# EAGLE board Practica2 (EAGLE 9.6.2)
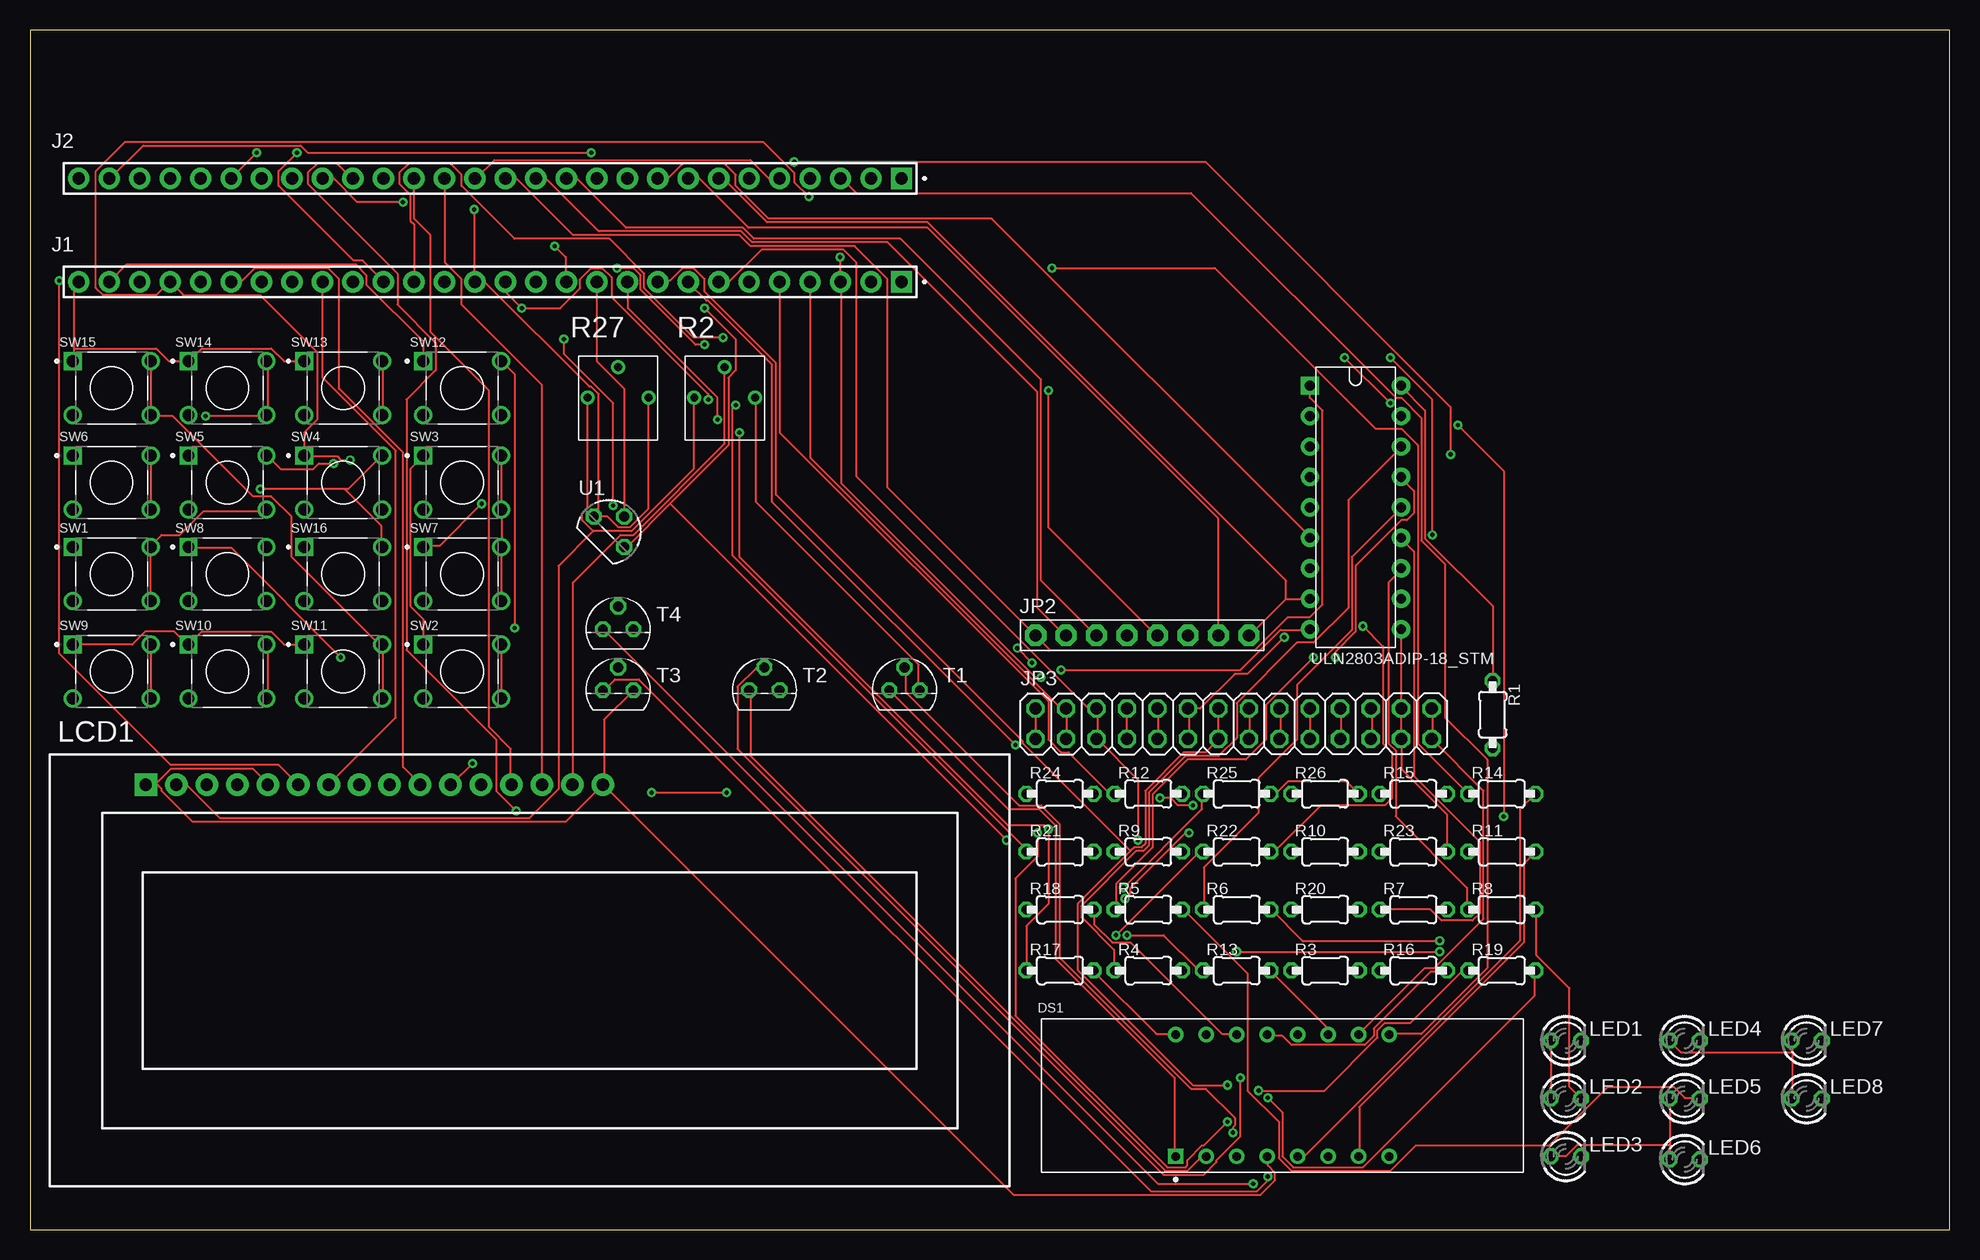
[diagram p0: board, top side]
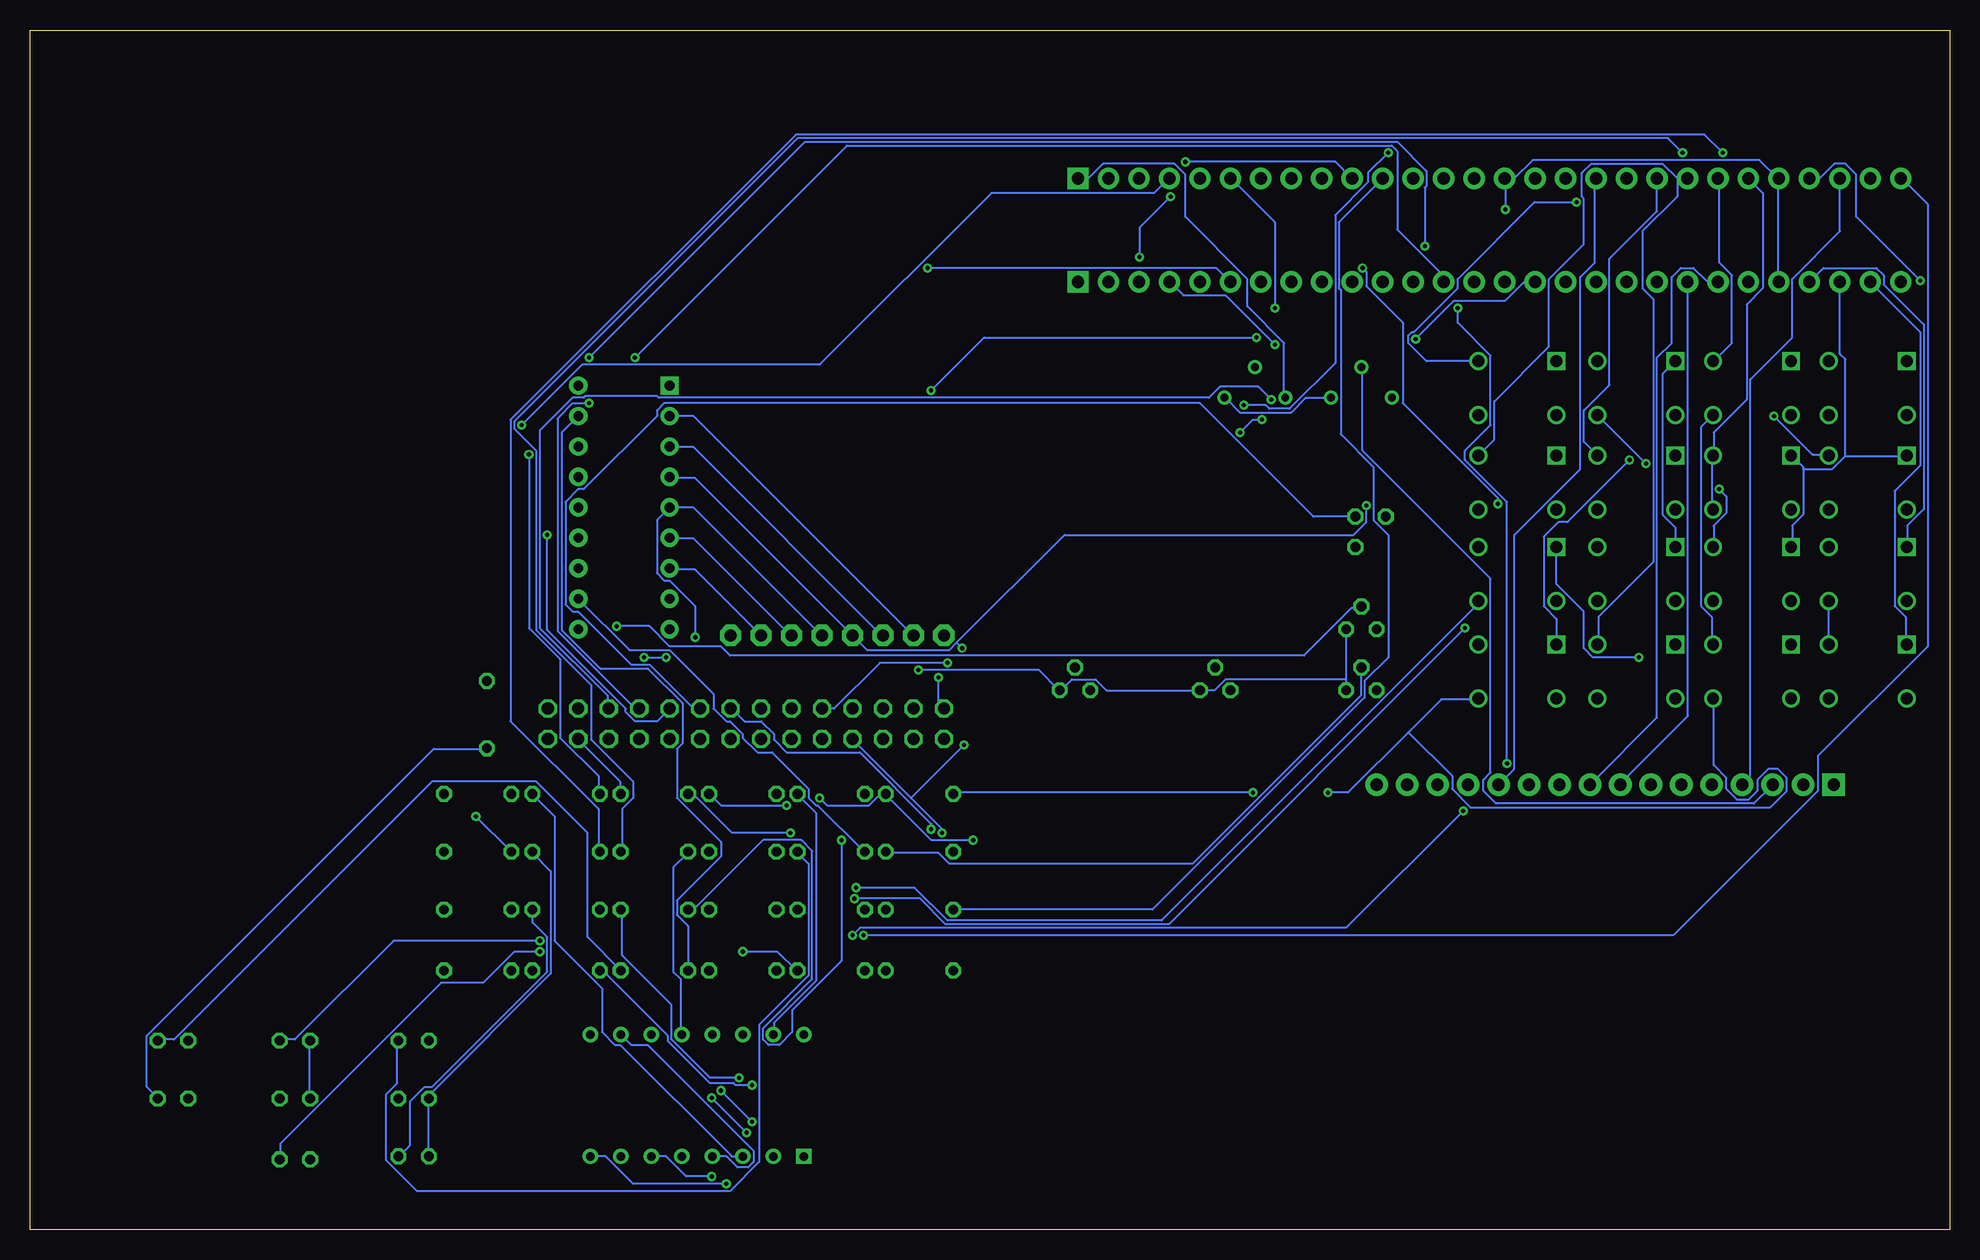
[diagram p1: board, bottom side, seen from below]

Size 160 x 100 mm. Coordinates in mm from the lower left corner, seen from the top.
Outline: 0,0 160,0 160,100 0,100 0,0
Copper layers (1*16): Top 0.035mm / dielectric 1.5mm / Bottom 0.035mm
Design rules "default *": minimum track width 6mil, minimum drill 0.35mm, track to track 6mil, track to pad 6mil, pad to pad 6mil, via to via 6mil, smd to smd 6mil, copper to edge 15mil, drill to drill 6mil, minimum pad ring 10mil, minimum via ring 8mil, stop-mask expansion 4mil, vias tented up to drill 0mil, thermal gap 10mil

## Footprints (pad centres in the part's own frame; a part is rotated, then mirrored left to right if it is on the bottom)
DISPLAY_TDCG1060M = drill 0.7 pad 1.27 square: 1 -8.89,-5.08 | drill 0.7 pad 1.27: 2 -6.35,-5.08; 3 -3.81,-5.08; 4 -1.27,-5.08; 5 1.27,-5.08; 6 3.81,-5.08; 7 6.35,-5.08; 8 8.89,-5.08; 9 8.89,5.08; 10 6.35,5.08; 11 3.81,5.08; 12 1.27,5.08; 13 -1.27,5.08; 14 -3.81,5.08; 15 -6.35,5.08; 16 -8.89,5.08
DIP-18_STM = drill 0.813 pad 1.524 square: 1 0,0 | drill 0.813 pad 1.524: 2 0,-2.54; 3 0,-5.08; 4 0,-7.62; 5 0,-10.16; 6 0,-12.7; 7 0,-15.24; 8 0,-17.78; 9 0,-20.32; 10 7.62,-20.32; 11 7.62,-17.78; 12 7.62,-15.24; 13 7.62,-12.7; 14 7.62,-10.16; 15 7.62,-7.62; 16 7.62,-5.08; 17 7.62,-2.54; 18 7.62,0
SAMTEC_SS-128-T-2 = drill 1.016 pad 1.778 square: 01 0,0 | drill 1.016 pad 1.778: 02 -2.54,0; 03 -5.08,0; 04 -7.62,0; 05 -10.16,0; 06 -12.7,0; 07 -15.24,0; 08 -17.78,0; 09 -20.32,0; 10 -22.86,0; 11 -25.4,0; 12 -27.94,0; 13 -30.48,0; 14 -33.02,0; 15 -35.56,0; 16 -38.1,0; 17 -40.64,0; 18 -43.18,0; 19 -45.72,0; 20 -48.26,0; 21 -50.8,0; 22 -53.34,0; 23 -55.88,0; 24 -58.42,0; 25 -60.96,0; 26 -63.5,0; 27 -66.04,0; 28 -68.58,0
1X08-BIG = drill 1.016 pad 1.778 octagon: 1 -8.89,0; 2 -6.35,0; 3 -3.81,0; 4 -1.27,0; 5 1.27,0; 6 3.81,0; 7 6.35,0; 8 8.89,0
2X14 = drill 1.016 octagon: 1 -16.51,-1.27; 2 -16.51,1.27; 3 -13.97,-1.27; 4 -13.97,1.27; 5 -11.43,-1.27; 6 -11.43,1.27; 7 -8.89,-1.27; 8 -8.89,1.27; 9 -6.35,-1.27; 10 -6.35,1.27; 11 -3.81,-1.27; 12 -3.81,1.27; 13 -1.27,-1.27; 14 -1.27,1.27; 15 1.27,-1.27; 16 1.27,1.27; 17 3.81,-1.27; 18 3.81,1.27; 19 6.35,-1.27; 20 6.35,1.27; 21 8.89,-1.27; 22 8.89,1.27; 23 11.43,-1.27; 24 11.43,1.27; 25 13.97,-1.27; 26 13.97,1.27; 27 16.51,-1.27; 28 16.51,1.27
LCD-16X2_NOHOLESNOSILK = drill 1.016 pad 1.88 square: 1 -32,15.5 | drill 1.016 pad 1.88: 2 -29.46,15.5; 3 -26.92,15.5; 4 -24.38,15.5; 5 -21.84,15.5; 6 -19.3,15.5; 7 -16.76,15.5; 8 -14.22,15.5; 9 -11.68,15.5; 10 -9.14,15.5; 11 -6.6,15.5; 12 -4.06,15.5; 13 -1.52,15.5; 14 1.02,15.5; 15 3.56,15.5; 16 6.1,15.5
LED3MM = drill 0.813 octagon: A -1.27,0; K 1.27,0
0207/10 = drill 0.813 octagon: 1 -1.54,0; 2 4.08,0
3362P-1-103LF = drill 0.66: 1 -2.54,0; 2 0,2.54; 3 2.54,0
TE_1825910-2 = drill 0.99 square: 1 0,0 | drill 0.99: 2 6.5,0; 3 0,-4.5; 4 6.5,-4.5
TO92 = drill 0.813 octagon: 1 1.27,0; 2 0,1.905; 3 -1.27,0
TO92/ = drill 0.813 octagon: 1 1.27,-1.27; 2 1.27,1.27; 3 -1.27,1.27

## Placement (x,y rotation side)
DS1  TDCG1060M  [DISPLAY_TDCG1060M]  104.39,11.18 0 top
IC1  ULN2803ADIP-18_STM  [DIP-18_STM]  106.68,70.36 0 top
J1  SS-128-T-2  [SAMTEC_SS-128-T-2]  72.64,78.99 0 top
J2  SS-128-T-2  [SAMTEC_SS-128-T-2]  72.64,87.63 0 top
JP2  [1X08-BIG]  92.71,49.53 0 top
JP3  [2X14]  100.33,42.16 0 top
LCD1  LCD-16X2NOHOLES  [LCD-16X2_NOHOLESNOSILK]  41.66,21.59 0 top
LED1  [LED3MM]  128.02,15.75 0 top
LED2  [LED3MM]  128.02,10.92 0 top
LED3  [LED3MM]  128.02,6.1 0 top
LED4  [LED3MM]  137.92,15.75 0 top
LED5  [LED3MM]  137.92,10.92 0 top
LED6  [LED3MM]  137.92,5.84 0 top
LED7  [LED3MM]  148.08,15.75 0 top
LED8  [LED3MM]  148.08,10.92 0 top
R1  R-US  [0207/10]  121.92,44.2 270 top
R2  10K  [3362P-1-103LF]  57.91,69.34 0 top
R3  R-US  [0207/10]  106.68,21.59 0 top
R4  R-US  [0207/10]  91.95,21.59 0 top
R5  R-US  [0207/10]  91.95,26.67 0 top
R6  R-US  [0207/10]  99.31,26.67 0 top
R7  R-US  [0207/10]  114.05,26.67 0 top
R8  R-US  [0207/10]  121.41,26.67 0 top
R9  R-US  [0207/10]  91.95,31.5 0 top
R10  R-US  [0207/10]  106.68,31.5 0 top
R11  R-US  [0207/10]  121.41,31.5 0 top
R12  R-US  [0207/10]  91.95,36.32 0 top
R13  R-US  [0207/10]  99.31,21.59 0 top
R14  R-US  [0207/10]  121.41,36.32 0 top
R15  R-US  [0207/10]  114.05,36.32 0 top
R16  R-US  [0207/10]  114.05,21.59 0 top
R17  R-US  [0207/10]  84.58,21.59 0 top
R18  R-US  [0207/10]  84.58,26.67 0 top
R19  R-US  [0207/10]  121.41,21.59 0 top
R20  R-US  [0207/10]  106.68,26.67 0 top
R21  R-US  [0207/10]  84.58,31.5 0 top
R22  R-US  [0207/10]  99.31,31.5 0 top
R23  R-US  [0207/10]  114.05,31.5 0 top
R24  R-US  [0207/10]  84.58,36.32 0 top
R25  R-US  [0207/10]  99.31,36.32 0 top
R26  R-US  [0207/10]  106.68,36.32 0 top
R27  10K  [3362P-1-103LF]  49.02,69.34 0 top
SW1  1825910-2  [TE_1825910-2]  3.56,56.9 0 top
SW2  1825910-2  [TE_1825910-2]  32.77,48.77 0 top
SW3  1825910-2  [TE_1825910-2]  32.77,64.52 0 top
SW4  1825910-2  [TE_1825910-2]  22.86,64.52 0 top
SW5  1825910-2  [TE_1825910-2]  13.21,64.52 0 top
SW6  1825910-2  [TE_1825910-2]  3.56,64.52 0 top
SW7  1825910-2  [TE_1825910-2]  32.77,56.9 0 top
SW8  1825910-2  [TE_1825910-2]  13.21,56.9 0 top
SW9  1825910-2  [TE_1825910-2]  3.56,48.77 0 top
SW10  1825910-2  [TE_1825910-2]  13.21,48.77 0 top
SW11  1825910-2  [TE_1825910-2]  22.86,48.77 0 top
SW12  1825910-2  [TE_1825910-2]  32.77,72.39 0 top
SW13  1825910-2  [TE_1825910-2]  22.86,72.39 0 top
SW14  1825910-2  [TE_1825910-2]  13.21,72.39 0 top
SW15  1825910-2  [TE_1825910-2]  3.56,72.39 0 top
SW16  1825910-2  [TE_1825910-2]  22.86,56.9 0 top
T1  BC547  [TO92]  72.9,44.96 0 top
T2  BC547  [TO92]  61.21,44.96 0 top
T3  BC547  [TO92]  49.02,44.96 0 top
T4  BC547  [TO92]  49.02,50.04 0 top
U1  LM60CIZ  [TO92/]  48.26,58.17 0 top

## Library data of the parts
DS1 = TE2015_Microcontroladores; DESCRIPTION: Display Modules - LED Character and Numeric Green 7-Segment Clock 4 Character Common Cathode 2V 20mA 0.504 H x 1.583 W x 0.276 D (12.80mm x 40.20mm x 7.00mm) 16-DIP (0.400, 10.16mm); DIGI-KEY_PART_NUMBER: TDCG1060M-ND; MF: Vishay; MP: TDCG1060M; PACKAGE: None; PURCHASE-URL: https://pricing.snapeda.com/search/part/TDCG1060M/?ref=eda
IC1 = TE2015_Microcontroladores; COPYRIGHT: Copyright (C) 2022 Ultra Librarian. All rights reserved.; DIGI-KEY_PART_NUMBER_1: 497-2356-5-ND; MANUFACTURER_PART_NUMBER: ULN2803A; MFR_NAME: STMicroelectronics
J1 J2 = TE2015_Microcontroladores; DESCRIPTION: 28 Position Receptacle Connector 0.100 (2.54mm) Through Hole Gold; DIGI-KEY_PART_NUMBER: SAM1117-28-ND; MF: Samtec; MP: SS-128-T-2; PACKAGE: None; PURCHASE-URL: https://pricing.snapeda.com/search/part/SS-128-T-2/?ref=eda
JP2 LED1-LED8 U1 = TE2015_Microcontroladores
JP3 = pinhead
LCD1 = TE2015_Microcontroladores; SF_ID: LCD-00255
R1 R3-R9 = TE2015_Microcontroladores; SPICEPREFIX: 1k
R2 R27 = TE2015_Microcontroladores; CREATED_PN: PCBLayout.com; DIGIKEY_PN: 3362P-103LF-ND; MANUFACTURER: Bourns Inc.; MPN: 3362P-1-103LF
R10-R18 = TE2015_Microcontroladores; SPICEPREFIX: 130
R19-R22 = TE2015_Microcontroladores; SPICEPREFIX: 52K
R23-R26 = TE2015_Microcontroladores; SPICEPREFIX: 1K
SW1-SW16 = TE2015_Microcontroladores; AVAILABILITY: In Stock; COMMENT: 1825910-2; CONFIGURATION_POLE-THROW: Single Pole - Single Throw; CONTACT_CURRENT_RATING: 50 mA; DESCRIPTION: 50 mA SPST Round Actuator 160 Gram Force Tactile Pushbutton Switch; EU_ROHS_COMPLIANCE: Compliant; MF: TE Connectivity; MP: 1825910-2; PACKAGE: None; PRICE: None; PURCHASE-URL: https://pricing.snapeda.com/search/part/1825910-2/?ref=eda
T1-T4 = transistor-neu-to92

## Nets
GND: DS1.4 DS1.10 IC1.9 J1.15 J1.24 J2.05 J2.15 J2.24 JP3.27 JP3.28 LCD1.1 LCD1.5 LCD1.16 R2.3 R27.3 T1.1 T2.1 T3.1 T4.1 U1.3
IC: J1.02
LCD_BK: LCD1.15 R2.2
N$1: IC1.18 R1.1
N$2: IC1.17 R3.1
N$3: IC1.16 R4.1
N$4: IC1.15 R5.1
N$5: IC1.14 R6.1
N$6: IC1.13 R7.1
N$7: IC1.12 R8.1
N$8: IC1.11 R9.1
N$9: DS1.12 R10.1
N$10: LED1.K R9.2
N$11: LED2.K R8.2
N$12: LED3.K R7.2
N$13: LED4.K R6.2
N$14: LED5.K R5.2
N$15: LED6.K R4.2
N$16: LED7.K R3.2
N$17: LED8.K R1.2
N$18: DS1.7 R11.2
N$19: DS1.15 R12.2
N$20: DS1.11 R13.2
N$21: DS1.5 R14.2
N$22: DS1.3 R15.2
N$23: DS1.13 R16.2
N$24: DS1.16 R17.2
N$25: DS1.14 R18.2
N$26: DS1.8 T4.3
N$27: DS1.6 T3.3
N$28: DS1.2 T2.3
N$29: DS1.1 T1.3
N$30: R19.2 T1.2
N$31: R20.2 T2.2
N$32: R21.2 T3.2
N$33: R22.2 T4.2
NC: J1.01
RA0: IC1.1 J2.14 JP2.1
RA1: IC1.2 J2.13 JP2.2
RA2: IC1.3 J2.12 JP2.3
RA3: IC1.4 J1.16 JP2.4 JP3.9 JP3.10
RA4: IC1.5 J1.17 JP2.5 JP3.11 JP3.12
RA5: IC1.6 J2.09 JP2.6
RA6: IC1.7 J2.08 JP2.7
RA7: IC1.8 J2.07 JP2.8
RB0: J2.11 R18.1
RB1: J1.10 JP3.15 JP3.16 R17.1
RB2: J1.09 JP3.13 JP3.14 R16.1
RB3: J2.10 R15.1
RB4: J1.06 R14.1
RB5: J2.19 R13.1
RB6: J1.05 R12.1
RB7: J2.04 R11.1
RC0: J2.28 R22.1
RC1: J2.27 R21.1
RC2: J1.07 JP3.5 JP3.6 R20.1
RC3: J1.08 JP3.7 JP3.8 R19.1
RC4: J1.11 JP3.17 JP3.18 U1.2
RC5: J1.12 JP3.19 JP3.20
RC6: J1.13 JP3.21 JP3.22
RC7: J1.19
RD0: J1.20 LCD1.7
RD1: J1.21 LCD1.8
RD2: J1.22 LCD1.9
RD3: J1.23 LCD1.10
RD4: J1.14 JP3.23 JP3.24 LCD1.11
RD5: J2.18 LCD1.12
RD6: J2.17 LCD1.13
RD7: J2.16 LCD1.14
RE0: J2.26 LCD1.4
RE1: J2.25 LCD1.6
RE2: J1.18 R10.2
RE3: DS1.9 J2.03
RF0: J1.03 J1.25 JP3.1 JP3.2 SW1.1 SW2.1 SW3.1 SW4.1
RF1: J1.04 J1.26 JP3.3 JP3.4 SW5.1 SW6.1 SW7.1 SW8.1
RF2: J1.27 SW9.1 SW10.1 SW11.1 SW12.1
RF3: J1.28 SW13.1 SW14.1 SW15.1 SW16.1
RF4: J2.23 R23.1 SW1.2 SW1.4 SW5.2 SW5.4 SW9.2 SW9.4 SW13.2 SW13.4
RF5: J2.22 R24.1 SW2.2 SW2.4 SW6.2 SW6.4 SW10.2 SW10.4 SW14.2 SW14.4
RF6: J2.21 R25.1 SW3.2 SW3.4 SW7.2 SW7.4 SW11.2 SW11.4 SW15.2 SW15.4
RF7: J2.20 R26.1 SW4.2 SW8.2 SW12.2 SW16.2
VBUS: J2.01 LCD1.2 R2.1 R27.1
VO: LCD1.3 R27.2
VOFF: J2.02
VTG: IC1.10 J2.06 JP3.25 JP3.26 LED1.A LED2.A LED3.A LED4.A LED5.A LED6.A LED7.A LED8.A R23.2 R24.2 R25.2 R26.2 U1.1

## Tracks (layer width: path | path; a pad name or v marks a point on that pad's centre or on a via)
GND  (via drill 0.35)
  Top 0.152: 47.4,59.44 48.16,59.44 49.07,58.52 49.99,58.52 51.51,60.05 51.51,69.34 R27.3 | 47.4,59.44 U1.3 47.09,59.44 | 47.4,59.44 47.4,69.65 46.79,70.26 46.63,70.26 37.95,78.94 37.19,78.94 J1.15 37.03,79.1 v37.03,85.04 | J2.05 61.57,87.63 60.05,89.15 38.71,89.15 37.19,87.63 J2.15 | JP3.28 116.89,43.43 116.89,41 JP3.27 121.16,36.58 121.16,25.91 117.04,21.79 116.28,21.79 DS1.10 | v85.95,46.63 100.89,46.63 104.24,49.99 106.68,49.99 IC1.9 | 10.52,37.19 9.75,37.19 LCD1.1 10.52,37.19 | 10.52,37.19 11.73,38.41 18.59,38.41 19.81,37.19 LCD1.5 | T3.1 47.85,42.52 47.85,37.19 LCD1.16 | 10.52,37.19 10.97,36.73 10.97,36.58 13.56,33.98 44.65,33.98 47.7,37.03 LCD1.16 | DS1.4 103.17,6.1 103.17,5.33 103.78,4.72 103.78,4.12 102.56,2.9 81.99,2.9 47.85,37.03 LCD1.16 | R2.3 60.5,69.34 60.5,60.66 74.07,47.09 74.07,44.96 T1.1
  Bottom 0.152: R27.3 53.65,69.34 54.86,68.12 59.13,68.12 60.35,69.34 R2.3 | 14.33,87.63 14.33,79.1 J1.24 | 37.03,87.63 36.27,87.63 34.75,89.15 15.85,89.15 14.33,87.63 | 14.33,87.63 J2.24 | 37.03,87.63 v37.03,85.04 | 37.03,87.63 J2.15 | DS1.4 101.96,6.1 101.04,5.18 100.13,5.18 99.67,5.64 99.67,6.55 108.51,15.39 109.88,15.39 DS1.10 | v85.95,46.63 75.89,46.63 74.22,44.96 T1.1 74.07,44.96 73.15,45.87 71.17,45.87 70.26,44.96 T2.1 61.27,44.96 60.35,45.87 50.29,45.87 | T4.1 50.29,45.87 | 50.29,45.87 T3.1
LCD_BK
  Top 0.152: R2.2 57.91,65.53 50.29,57.91 49.23,57.91 45.26,53.95 45.26,37.19 LCD1.15
N$1
  Top 0.152: R1.1 121.92,51.97 116.28,57.61 116.28,68.28 114.3,70.26 IC1.18
N$2
  Bottom 0.152: IC1.17 115.67,66.45 115.67,49.99 112.47,46.79 108.51,46.79 105.61,43.89 105.61,40.54 106.07,40.08 106.07,35.97 102.41,32.31 102.41,31.09 106.07,27.43 106.07,26.21 105.16,25.3 105.16,21.64 R3.1
N$3
  Top 0.152: R4.1 90.37,21.64 90.37,23.32 87.63,26.06 87.63,26.98 92.2,31.55 92.81,31.55 93.27,32 93.27,36.42 96.32,39.47 99.06,39.47 100.58,41 100.58,43.89 105.61,48.92 106.98,48.92 109.88,51.82 109.88,60.81 114.3,65.23 IC1.16
N$4  (via drill 0.35)
  Top 0.152: v106.98,47.7 103.02,43.74 103.02,40.84 101.35,39.17 96.47,39.17 93.57,36.27 93.57,31.85 90.53,28.8 90.53,26.67 R5.1 | v108.81,47.7 108.81,48.16 110.49,49.84 110.49,55.32 114.3,59.13 114.76,59.13 115.37,59.74 115.37,61.57 114.3,62.64 IC1.15
  Bottom 0.152: v108.81,47.7 v106.98,47.7
N$5
  Top 0.152: IC1.14 110.19,56.08 110.19,49.99 105.61,45.41 105.61,40.84 102.41,37.64 102.41,34.75 97.84,30.18 97.84,26.67 R6.1
N$6
  Top 0.152: R7.1 116.74,26.67 117.65,25.76 120.24,25.76 120.85,26.36 120.85,32.31 115.37,37.8 115.37,56.54 114.3,57.61 IC1.13
N$7
  Top 0.152: R8.1 119.79,26.67 119.79,28.5 113.84,34.44 113.84,39.93 113.23,40.54 113.23,53.95 114.3,55.02 IC1.12
N$8
  Bottom 0.152: IC1.11 110.03,48.31 106.68,48.31 103.02,44.65 103.02,43.43 101.96,42.37 101.65,42.37 100.58,41.3 100.58,41 99.36,39.78 98.15,39.78 95.1,36.73 95.1,35.97 94.49,35.36 94.34,35.36 90.53,31.55 R9.1
N$9
  Bottom 0.152: DS1.12 105.77,16.31 105.77,20.88 106.38,21.49 106.38,30.18 105.16,31.39 R10.1
N$10
  Bottom 0.152: LED1.K 129.39,15.7 129.39,12.19 130.3,11.28 130.3,5.79 127.71,3.2 101.65,3.2 99.21,5.64 99.21,17.07 95.1,21.18 95.1,30.48 96.01,31.39 R9.2
N$11
  Top 0.152: LED2.K 128.32,11.89 128.32,20.12 125.58,22.86 125.58,26.67 R8.2
N$12
  Bottom 0.152: R7.2 118.11,26.67 118.11,25.6 116.89,24.38 116.89,21.49 126.49,11.89 127.1,11.89 128.32,10.67 128.32,7.01 129.24,6.1 LED3.K
N$13  (via drill 0.35)
  Top 0.152: v117.5,24.08 106.07,24.08 103.48,26.67 R6.2
  Bottom 0.152: v117.5,24.08 129.69,24.08 137.92,15.85 139.14,15.85 LED4.K
N$14
  Top 0.152: LED5.K 139.14,10.97 137.92,10.97 137.01,11.89 131.52,11.89 126.64,7.01 115.52,7.01 113.39,4.88 105.16,4.88 104.09,5.94 104.09,8.99 101.5,11.58 101.5,21.34 96.16,26.67 R5.2
N$15  (via drill 0.35)
  Top 0.152: v100.58,23.16 v117.5,23.16
  Bottom 0.152: v117.5,23.16 119.63,23.16 122.22,20.57 125.73,20.57 139.14,7.16 139.14,5.94 LED6.K | v100.58,23.16 97.69,23.16 96.16,21.64 R4.2
N$16
  Bottom 0.152: LED7.K 149.35,15.85 147.98,15.85 126.49,37.34 117.81,37.34 113.54,33.07 113.54,24.38 110.8,21.64 R3.2
N$17
  Bottom 0.152: R1.2 121.92,40.08 126.34,40.08 150.27,16.15 150.27,11.89 149.35,10.97 LED8.K
N$18
  Top 0.152: DS1.7 110.8,6.1 110.8,10.21 124.51,23.93 124.51,30.48 125.42,31.39 R11.2
N$19
  Bottom 0.152: DS1.15 97.99,16.31 97.99,17.22 94.49,20.73 94.49,34.75 96.01,36.27 R12.2
N$20
  Top 0.152: DS1.11 108.2,16.76 103.48,21.49 R13.2
N$21
  Top 0.152: DS1.5 106.22,6.1 124.21,24.08 124.21,35.05 125.42,36.27 R14.2
N$22
  Bottom 0.152: DS1.3 101.5,6.1 110.8,15.39 111.25,15.39 112.32,16.46 112.32,20.12 116.28,24.08 116.28,34.44 118.11,36.27 R15.2
N$23
  Top 0.152: DS1.13 103.17,16.15 104.39,16.15 105.16,15.39 111.25,15.39 112.01,16.15 112.01,16.76 116.74,21.49 118.11,21.49 R16.2
N$24
  Top 0.152: DS1.16 95.4,16.31 93.88,16.31 88.7,21.49 R17.2
N$25
  Top 0.152: DS1.14 100.58,16.31 99.36,16.31 91.75,23.93 90.22,23.93 88.7,25.45 88.7,26.67 R18.2
N$26  (via drill 0.35)
  Top 0.152: v101.96,3.81 94.03,3.81 47.85,49.99 T4.3
  Bottom 0.152: DS1.8 112.01,6.1 109.73,3.81 v101.96,3.81
N$27  (via drill 0.35)
  Top 0.152: v103.17,4.42 103.17,4.12 102.26,3.2 93.42,3.2 50.75,45.87 48.77,45.87 47.85,44.96 T3.3
  Bottom 0.152: DS1.6 106.98,6.1 105.31,4.42 v103.17,4.42
N$28
  Top 0.152: DS1.2 97.69,6.1 96.47,4.88 94.64,4.88 60.05,39.47 60.05,44.96 T2.3
N$29
  Top 0.152: T1.3 81.53,35.05 84.12,35.05 85.5,33.68 85.5,22.55 95.4,12.65 95.4,6.1 DS1.1
N$30  (via drill 0.35)
  Top 0.152: v103.17,10.97 104.39,9.75 104.39,6.1 105.31,5.18 111.1,5.18 125.42,19.51 125.42,21.49 R19.2 | v100.28,8.08 100.28,8.53 100.43,8.69 100.43,9.3 97.99,11.73 96.77,11.73 85.8,22.71 85.8,33.83 84.28,35.36 82.45,35.36 73,44.81 73,46.79 T1.2
  Bottom 0.152: v100.28,8.08 v103.17,10.97
N$31  (via drill 0.35)
  Top 0.152: v100.89,12.65 100.89,7.77 98.91,5.79 98.91,5.64 97.84,4.57 94.49,4.57 58.98,40.08 58.98,45.26 60.5,46.79 61.11,46.79 T2.2
  Bottom 0.152: v100.89,12.65 103.33,12.65 106.53,15.85 106.53,18.75 110.64,22.86 110.64,26.67 R20.2
N$32
  Bottom 0.152: R21.2 88.54,31.39 84.28,31.39 83.36,30.48 63.09,30.48 49.07,44.5 49.07,46.79 T3.2
N$33  (via drill 0.35)
  Top 0.152: v111.1,50.29 112.78,48.62 112.78,40.54 113.54,39.78 113.54,35.97 112.93,35.36 107.59,35.36 103.78,31.55 103.48,31.55 R22.2
  Bottom 0.152: v111.1,50.29 108.36,50.29 106.68,48.62 102.41,48.62 101.65,47.85 53.8,47.85 49.84,51.82 49.07,51.82 T4.2
RA0
  Top 0.152: IC1.1 106.68,69.34 107.75,68.28 107.75,52.12 106.68,51.05 104.85,51.05 102.11,48.31 85.04,48.31 JP2.1 71.48,61.87 71.48,79.25 68.73,81.99 60.05,81.99 59.13,82.91 45.26,82.91 40.54,87.63 J2.14
RA1
  Top 0.152: J2.13 42.98,87.63 47.4,83.21 59.28,83.21 60.2,82.3 71.48,82.3 83.97,69.8 83.97,51.82 86.26,49.53 JP2.2
  Bottom 0.152: IC1.2 104.7,67.82 86.41,49.53 JP2.2
RA2
  Top 0.152: J2.12 45.57,87.63 49.68,83.52 59.44,83.52 60.35,82.6 72.54,82.6 84.28,70.87 84.28,54.1 88.85,49.53 JP2.3
  Bottom 0.152: IC1.3 106.68,65.23 104.7,65.23 89,49.53 JP2.3
RA3  (via drill 0.35)
  Top 0.152: JP3.9 94.03,41 94.03,43.43 JP3.10 | v44.5,74.22 44.5,73 48.62,68.89 v48.62,60.35 | v82.3,48.46 v83.52,47.24
  Bottom 0.152: IC1.4 106.68,62.64 104.55,62.64 JP2.4 90.22,48.31 83.36,48.31 82.75,48.92 | v44.5,74.22 41.3,77.42 37.03,77.42 35.51,78.94 34.59,78.94 J1.16 | v48.62,60.35 48.62,58.98 49.68,57.91 73.76,57.91 82.75,48.92 | JP3.10 92.96,43.43 89.15,47.24 v83.52,47.24 | 82.75,48.92 v82.3,48.46
RA4  (via drill 0.35)
  Top 0.152: 96.62,43.43 96.62,41 JP3.11 | J1.17 32,83.82 31.7,84.12 31.7,86.26 30.79,87.17 30.79,88.09 31.55,88.85 35.05,88.85 35.97,87.94 35.97,87.02 40.39,82.6 48.31,82.6 51.21,79.7 51.21,78.49 55.32,74.37 v57.76,74.37 | v84.89,69.95 84.89,58.52 93.88,49.53 JP2.5 | 96.62,43.43 97.54,43.43 100.43,46.33 101.5,46.33 v104.55,49.38 | 96.62,43.43 JP3.12
  Bottom 0.152: JP2.5 94.03,49.53 104.7,60.2 IC1.5 107.75,59.13 107.75,54.71 107.14,54.1 106.68,54.1 104.55,51.97 v104.55,49.38 | v57.76,74.37 80.47,74.37 v84.89,69.95
RA5
  Top 0.152: J2.09 53.19,87.63 54.41,88.85 57.91,88.85 58.83,87.94 58.83,87.02 61.57,84.28 80.16,84.28 106.68,57.76 IC1.6
  Bottom 0.152: IC1.6 106.68,57.61 104.7,57.61 96.62,49.53 JP2.6
RA6
  Top 0.152: J2.08 55.78,87.63 59.89,83.52 74.83,83.52 99.06,59.28 JP2.7
  Bottom 0.152: JP2.7 104.55,55.02 106.68,55.02 IC1.7
RA7
  Top 0.152: 104.7,52.58 IC1.8 | 104.7,52.58 101.65,49.53 JP2.8 | J2.07 57.76,87.63 61.42,83.97 74.83,83.97 104.7,54.1 104.7,52.58
RB0
  Bottom 0.152: R18.1 66.45,26.67 48.77,44.35 48.77,45.72 46.79,47.7 46.79,57.91 48.01,59.13 48.01,63.55 50.75,66.29 50.75,78.33 50.9,78.49 50.9,83.97 J2.11
RB1  (via drill 0.35)
  Top 0.152: R17.1 83.06,21.64 83.06,25.3 84.89,27.13 v84.89,33.38 84.58,33.68 81.53,33.68 59.13,56.08 v59.13,66.45 | JP3.15 101.65,41 101.65,43.43 JP3.16 | v57.3,67.51 57.3,69.34 49.84,76.81 49.84,78.94 J1.10
  Bottom 0.152: v84.89,33.38 84.89,33.83 90.83,39.78 96.93,39.78 97.99,40.84 97.99,41.3 99.06,42.37 100.43,42.37 101.5,43.43 JP3.16 | v57.3,67.51 58.06,67.51 v59.13,66.45
RB2  (via drill 0.35)
  Top 0.152: v99.82,12.04 96.93,12.04 87.33,21.64 87.33,27.13 91.75,31.55 | 91.75,31.55 92.05,31.85 92.66,31.85 92.96,32.16 92.96,36.58 96.16,39.78 97.99,39.78 99.06,40.84 JP3.13 JP3.14 | 91.75,31.55 82.75,40.54 82.75,40.69 62.18,61.27 62.18,72.24 56.24,78.18 56.24,79.25 55.32,80.16 54.41,80.16 53.34,79.1 52.43,79.1 J1.09
  Bottom 0.152: v99.82,12.04 101.19,12.04 101.35,12.19 103.33,12.19 106.83,15.7 106.83,16.15 112.17,21.49 112.47,21.49 R16.1
RB3  (via drill 0.35)
  Top 0.152: v118.42,64.62 118.42,68.58 97.99,89 v63.7,89
  Bottom 0.152: v118.42,64.62 118.42,50.14 115.82,47.55 115.82,41 112.62,37.8 112.62,36.42 R15.1 | v63.7,89 51.21,89 49.84,87.63 J2.10
RB4  (via drill 0.35)
  Top 0.152: v85.19,80.16 98.75,80.16 112.17,66.75 114.3,66.75 115.67,65.38 115.67,40.54 119.79,36.42 R14.1
  Bottom 0.152: v85.19,80.16 61.11,80.16 J1.06
RB5  (via drill 0.35)
  Top 0.152: v91.44,24.54 94.49,24.54 97.38,21.64 97.69,21.64 R13.1 | v40.54,34.9 38.86,36.58 38.86,40.84 31.39,48.31 31.39,69.19 33.83,71.63 33.83,73.91 30.63,77.11 30.63,79.7 23.16,87.17 23.16,88.09 23.93,88.85 25.6,88.85 26.82,87.63 J2.19
  Bottom 0.152: v91.44,24.54 90.83,25.15 50.29,25.15 v40.54,34.9
RB6
  Top 0.152: J1.05 62.48,66.45 84.89,44.04 84.89,40.84 85.95,39.78 86.56,39.78 89.92,36.42 90.37,36.42 R12.1
RB7  (via drill 0.35)
  Top 0.152: v122.83,34.44 122.83,63.25 v119.02,67.06
  Bottom 0.152: v122.83,34.44 119.94,31.55 R11.1 | v119.02,67.06 114,72.08 94.18,72.08 79.86,86.41 66.29,86.41 65.08,87.63 J2.04
RC0  (via drill 0.35)
  Top 0.152: v90.53,24.54 97.38,31.39 97.69,31.39 R22.1
  Bottom 0.152: v90.53,24.54 23.01,24.54 10.97,36.58 10.97,39.47 1.83,48.62 1.83,85.5 3.96,87.63 J2.28
RC1  (via drill 0.35)
  Top 0.152: v58.83,68.73 58.52,68.43 58.52,56.24 82.91,31.85 82.91,31.55 R21.1 | v46.79,89.76 23.16,89.76 22.55,90.37 9.45,90.37 6.71,87.63 J2.27
  Bottom 0.152: v58.83,68.73 57,68.73 56.69,68.43 55.02,68.43 51.21,72.24 51.21,84.58 48.46,87.33 48.46,88.09 v46.79,89.76
RC2  (via drill 0.35)
  Top 0.152: v92.35,32.46 92.35,37.49 89,40.84 JP3.5 89,41 89,43.43 JP3.6 88.24,43.43 68.89,62.79 68.89,80.62 67.82,81.69 60.96,81.69 58.37,79.1 57.45,79.1 J1.07
  Bottom 0.152: R20.1 104.7,26.67 98.91,32.46 95.71,32.46 94.79,31.55 94.79,20.88 98.91,16.76 98.91,15.85 98.45,15.39 97.54,15.39 96.47,16.46 96.47,18.29 92.35,22.4 v92.35,32.46
RC3  (via drill 0.35)
  Top 0.152: v102.41,11.58 107.9,11.58 112.32,16 112.32,16.61 112.93,17.22 115.06,17.22 119.33,21.49 119.79,21.49 R19.1 | v99.82,8.99 97.84,7.01 97.69,7.01 96.47,5.79 96.47,5.33 96.32,5.18 94.79,5.18 82.14,17.83 82.14,29.26 83.97,31.09 v83.97,33.07 | JP3.7 JP3.8 | v82.14,40.39 61.87,60.66 61.87,72.08 56.54,77.42 56.39,77.42 54.86,78.94 J1.08
  Bottom 0.152: v99.82,8.99 v102.41,11.58 | v83.97,33.07 83.97,33.38 86.56,35.97 | 86.56,35.97 91.44,40.84 JP3.7 | 86.56,35.97 v82.14,40.39
RC4
  Top 0.152: JP3.17 104.24,41 104.24,43.43 JP3.18 | U1.2 49.53,70.1 47.24,72.39 J1.11
  Bottom 0.152: JP3.18 104.7,43.43 108.36,47.09 109.88,47.09 114.3,51.51 114.76,51.51 115.37,52.12 115.37,60.66 114.3,61.72 113.84,61.72 107.75,67.82 107.75,68.28 107.14,68.89 62.48,68.89 53.03,59.44 U1.2
RC5  (via drill 0.35)
  Top 0.152: JP3.20 JP3.19 | v43.74,81.99 44.65,81.08 44.65,79.1 J1.12 | v113.39,72.69 116.89,69.19 v116.89,57.91
  Bottom 0.152: v43.74,81.99 43.74,86.87 43.59,87.02 43.59,88.24 46.02,90.68 95.4,90.68 v113.39,72.69 | v116.89,57.91 116.89,49.99 110.34,43.43 110.34,43.13 109.58,42.37 107.75,42.37 JP3.20
RC6  (via drill 0.35)
  Top 0.152: JP3.21 109.27,41 109.27,43.43 JP3.22 | v113.39,68.89 v109.58,72.69
  Bottom 0.152: v109.58,72.69 91.9,90.37 46.48,90.37 46.02,89.92 46.02,83.36 42.22,79.55 42.22,79.1 J1.13 | v113.39,68.89 114.76,68.89 115.98,67.67 115.98,49.84 109.58,43.43 JP3.22
RD0
  Top 0.152: J1.20 24.38,71.02 30.48,64.92 30.48,42.67 24.99,37.19 LCD1.7
RD1
  Bottom 0.152: J1.21 21.79,78.94 21.79,42.82 27.43,37.19 LCD1.8
RD2
  Bottom 0.152: J1.22 19.36,79.1 20.27,79.1 21.34,80.16 22.4,80.16 23.16,79.4 23.16,73.91 24.38,72.69 24.38,42.67 29.87,37.19 LCD1.9
RD3
  Top 0.152: J1.23 16.76,79.1 17.68,79.1 18.75,80.16 24.84,80.16 25.76,79.25 25.76,70.1 31.09,64.77 31.09,38.56 32.46,37.19 LCD1.10
RD4  (via drill 0.35)
  Top 0.152: JP3.23 111.86,41 111.86,43.43 JP3.24 | J1.14 39.62,78.18 v41,76.81 44.2,76.81 45.87,78.49 45.87,79.25 46.79,80.16 47.7,80.16 48.46,79.4 48.46,77.72 56.54,69.65 v56.54,69.19 | v36.88,38.86 35.2,37.19 LCD1.11
  Bottom 0.152: v41,76.81 41,75.59 38.25,72.85 38.25,67.06 40.39,64.92 40.39,64.16 36.88,60.66 v36.88,38.86 | v56.54,69.19 57.61,70.26 60.81,70.26 61.72,69.34 107.59,69.34 107.75,69.49 113.69,69.49 113.84,69.34 114.76,69.34 117.5,66.6 117.5,50.14 111.86,44.5 111.86,43.43 JP3.24
RD5
  Bottom 0.152: J2.18 29.57,87.63 29.57,80.62 30.79,79.4 30.79,63.4 36.27,57.91 36.27,38.41 37.49,37.19 LCD1.12
RD6
  Top 0.152: J2.17 32,84.28 33.38,82.91 33.38,74.83 38.25,69.95 38.25,41.91 40.08,40.08 40.08,37.19 LCD1.13
RD7
  Top 0.152: J2.16 34.59,87.63 34.59,80.62 35.97,79.25 35.97,77.11 42.67,70.41 42.67,37.19 LCD1.14
RE0
  Bottom 0.152: J2.26 9.14,83.21 13.11,79.25 13.11,74.37 16.61,70.87 16.61,37.8 17.22,37.19 LCD1.4
RE1  (via drill 0.35)
  Top 0.152: v2.44,79.1 2.44,48.01 11.73,38.71 20.73,38.71 22.25,37.19 LCD1.6
  Bottom 0.152: J2.25 10.82,87.63 9.6,88.85 8.69,88.85 7.77,87.94 7.77,84.43 v2.44,79.1
RE2  (via drill 0.35)
  Top 0.152: v22.25,89.76 20.73,88.24 20.73,87.02 26.98,80.77 27.74,80.77 29.41,79.1 J1.18
  Bottom 0.152: v22.25,89.76 23.47,90.98 96.01,90.98 119.63,67.36 119.63,66.75 117.81,64.92 117.81,49.99 113.23,45.41 113.23,40.84 109.73,37.34 109.73,35.97 110.64,35.05 110.64,31.55 R10.2
RE3
  Top 0.152: DS1.9 113.39,16.31 115.98,16.31 121.46,21.79 121.46,39.17 117.96,42.67 117.96,55.47 115.98,57.45 115.98,67.67 114.3,69.34 113.84,69.34 96.77,86.41 68.89,86.41 67.67,87.63 J2.03
RF0  (via drill 0.35)
  Top 0.152: JP3.2 JP3.1 | v84.28,46.02 83.82,46.02 67.67,62.18 67.67,78.94 J1.03 67.51,79.1 v67.51,81.08 | SW2.1 32.77,50.9 31.7,51.97 31.7,63.4 32.77,64.47 SW3.1 | v26.67,64.16 25.91,64.16 25.6,64.47 22.86,64.47 SW4.1 22.86,66.45 23.93,67.51 23.93,73.15 19.2,77.88 12.8,77.88 J1.25 11.58,78.94 10.52,77.88 6.1,77.88 5.49,78.49 5.49,88.24 7.92,90.68 61.11,90.68 63.7,88.09 63.7,87.33 v64.92,86.11
  Bottom 0.152: v84.28,46.02 84.28,43.89 JP3.2 | J1.25 10.52,80.16 6.1,80.16 5.49,79.55 5.49,78.79 2.13,75.44 2.13,60.05 3.5,58.67 3.5,57 SW1.1 | SW2.1 32.77,50.9 33.83,51.97 33.83,57.76 32.61,58.98 31.85,58.98 v26.67,64.16 | v67.51,81.08 67.51,83.52 v64.92,86.11
RF1  (via drill 0.35)
  Top 0.152: v25.91,47.7 16.76,56.84 13.26,56.84 SW8.1 | JP3.3 86.41,41 86.41,43.43 JP3.4 85.95,43.43 65.08,64.31 65.08,78.94 J1.04 | v37.64,60.5 34.14,57 32.77,57 SW7.1 | v48.92,80.16 50.29,80.16 50.9,79.55 50.9,78.33 55.47,73.76 v56.24,73.76
  Bottom 0.152: 12.19,63.4 12.19,63.55 13.11,64.47 SW5.1 | 12.19,63.4 12.19,59.59 13.11,58.67 13.11,57 SW8.1 | SW7.1 32.77,53.8 30.48,51.51 30.48,48.46 29.72,47.7 v25.91,47.7 | 8.69,64.47 3.66,64.47 SW6.1 | 8.69,64.47 9.75,63.4 12.19,63.4 | J1.26 9.14,73 8.69,72.54 8.69,64.47 | v37.64,60.5 37.64,60.96 45.57,68.89 45.57,75.59 48.62,78.64 48.62,79.86 v48.92,80.16 | v56.24,73.76 60.35,77.88 63.86,77.88 64.92,78.94 J1.04
RF2
  Top 0.152: SW9.1 8.53,48.77 9.6,49.84 12.04,49.84 13.11,48.77 SW10.1 13.26,48.77 14.33,49.84 20.12,49.84 21.18,48.77 SW11.1 | SW12.1 32.77,74.07 28.04,78.79 28.04,79.55 27.13,80.47 8.08,80.47 J1.27
  Bottom 0.152: J1.27 2.44,74.83 2.44,63.7 4.57,61.57 4.57,51.97 3.66,51.05 3.66,48.77 SW9.1
RF3
  Top 0.152: 3.66,73.46 3.66,78.64 3.96,78.94 J1.28 | 3.66,73.46 3.66,72.39 SW15.1 | 3.66,73.46 10.52,73.46 11.58,72.39 SW14.1 13.26,72.39 14.33,73.46 20.12,73.46 21.18,72.39 SW13.1
  Bottom 0.152: SW16.1 22.86,58.52 23.93,59.59 23.93,71.32 SW13.1
RF4  (via drill 0.35)
  Top 0.152: SW13.4 29.41,67.97 29.41,72.39 SW13.2 | SW9.4 10.06,44.35 SW9.2 | SW1.4 10.06,52.43 10.06,56.84 SW1.2 10.06,57 10.97,57.91 12.5,57.91 14.48,59.89 19.66,59.89 SW5.4 | v25.3,63.86 24.08,63.86 23.62,63.4 20.88,63.4 19.81,64.47 SW5.2 | J2.23 v18.9,89.76
  Bottom 0.152: SW5.4 19.81,60.05 19.81,64.47 SW5.2 19.66,64.62 19.66,66.45 16.92,69.19 16.92,77.11 15.54,78.49 15.54,86.41 J2.23 | SW1.4 10.06,52.27 SW9.2 | v25.3,63.86 29.26,67.82 SW13.4 | v18.9,89.76 20.42,91.29 96.16,91.29 119.94,67.51 119.94,42.37 112.62,35.05 112.62,31.55 R23.1
RF5  (via drill 0.35)
  Top 0.152: SW6.4 10.06,60.05 10.06,64.47 SW6.2 | SW10.4 19.81,44.35 19.81,48.77 SW10.2 | SW14.2 19.81,72.39 19.81,67.97 SW14.4 19.66,67.82 v14.63,67.82 | v51.82,36.42 v58.06,36.42 | SW2.2 39.32,48.77 39.32,44.35 SW2.4
  Bottom 0.152: J2.22 19.2,87.63 19.2,80.62 18.14,79.55 18.14,73.91 19.66,72.39 SW14.2 | SW10.2 19.81,48.77 19.81,51.05 20.73,51.97 20.73,66.9 19.81,67.82 SW14.4 | v14.63,67.82 11.43,64.62 10.06,64.62 SW6.2 | v58.06,36.42 82.91,36.42 R24.1 | v51.82,36.42 50.14,36.42 45.11,41.45 | 45.11,41.45 42.37,44.2 39.32,44.2 SW2.4 | 45.11,41.45 41.45,37.8 41.45,36.73 39.93,35.2 14.94,35.2 13.56,36.58 13.56,37.64 14.33,38.41 15.09,38.41 16,37.49 16,36.58 16.76,35.81 17.68,35.81 18.59,36.73 18.59,37.64 19.66,38.71 19.66,44.2 SW10.4
RF6  (via drill 0.35)
  Top 0.152: SW15.2 10.06,67.97 SW15.4 10.06,67.82 11.89,67.82 18.59,61.11 20.12,61.11 21.79,59.44 21.79,56.08 29.11,48.77 SW11.2 29.41,48.77 29.41,44.35 SW11.4 | SW3.2 39.32,64.47 39.32,60.05 SW3.4 39.32,59.89 39.32,57 SW7.2 39.32,56.84 39.32,52.43 SW7.4 | v91.14,28.5 97.69,35.05 97.69,36.27 R25.1
  Bottom 0.152: 22.71,87.63 J2.21 21.95,87.63 | 22.71,87.63 23.93,88.85 29.87,88.85 30.63,88.09 30.63,86.11 30.48,85.95 30.48,82.14 33.38,79.25 33.38,73.61 37.95,69.04 37.95,65.84 39.17,64.62 SW3.2 | 22.71,87.63 22.71,86.11 25.6,83.21 25.6,78.49 24.69,77.57 24.69,55.63 29.26,51.05 29.26,48.77 SW11.2 | v91.14,28.5 86.26,28.5 83.52,25.76 65.68,25.76 39.17,52.27 SW7.4
RF7  (via drill 0.35)
  Top 0.152: 26.21,61.72 26.52,61.72 29.26,64.47 SW4.2 | 26.21,61.72 v19.2,61.72 | 26.21,61.72 29.26,58.67 29.26,57 SW16.2 | v96.62,33.07 96.32,33.07 91.75,28.5 91.75,28.04 v91.29,27.58 | v40.39,50.14 40.39,71.32 39.32,72.39 SW12.2 | J2.20 25.3,87.63 27.28,85.65 v31.09,85.65
  Bottom 0.152: v19.2,61.72 18.59,61.11 18.59,59.74 19.66,58.67 19.66,57 SW8.2 | J2.20 24.38,84.89 28.35,80.92 28.35,70.41 30.48,68.28 30.48,65.68 29.41,64.62 SW4.2 | v96.62,33.07 101.5,33.07 104.7,36.27 105,36.27 R26.1 | v91.29,27.58 85.8,27.58 83.67,25.45 65.08,25.45 v40.39,50.14 | v31.09,85.65 34.59,85.65 41,79.25 41,78.49 44.65,74.83 44.81,74.83 45.11,74.52 45.11,73.91 43.59,72.39 SW12.2
VBUS
  Top 0.152: R27.1 46.48,60.2 46.02,59.74 46.02,59.13 46.94,58.22 | 46.94,58.22 50.14,58.22 55.32,63.4 55.32,69.34 R2.1 | 46.94,58.22 44.04,55.32 44.04,36.73 41.6,34.29 15.85,34.29 13.11,37.03 12.34,37.03 LCD1.2
  Bottom 0.152: J2.01 71.78,87.63 70.56,88.85 64.62,88.85 63.7,87.94 63.7,84.43 58.52,79.25 58.52,76.96 55.47,73.91 55.47,69.34 R2.1
VO
  Bottom 0.152: R27.2 48.92,71.78 48.92,64.92 38.25,54.25 38.25,38.1 38.86,37.49 38.86,36.58 37.8,35.51 16.31,35.51 14.78,37.03 LCD1.3
VTG  (via drill 0.35)
  Top 0.152: 53.34,60.5 58.22,65.38 58.22,71.02 58.83,71.63 58.83,74.22 v56.24,76.81 | 53.34,60.5 49.84,57 49.53,57 U1.1 | LED1.A 126.8,15.7 126.8,10.97 LED2.A | 146.91,14.78 146.91,15.7 LED7.A | 146.91,14.78 146.91,10.97 LED8.A | 136.7,7.01 136.7,10.82 LED5.A | 136.7,7.01 136.7,5.94 LED6.A | 146.91,14.78 137.62,14.78 LED4.A | LED3.A 128.02,6.1 128.93,7.01 136.7,7.01 | v94.18,35.97 95.1,35.97 95.71,35.36 v96.93,35.36 | R23.2 118.11,31.55 118.11,34.59 114.3,38.41 JP3.25 JP3.26 IC1.10 | R25.2 103.48,36.42 103.94,36.42 104.85,37.34 109.73,37.34 110.64,36.42 R26.2 | v81.38,32.46 53.34,60.5
  Bottom 0.152: v56.24,76.81 56.24,83.97 59.89,87.63 J2.06 | LED3.A 126.8,6.1 126.8,10.82 LED2.A 126.64,10.97 126.64,11.28 116.59,21.34 116.59,29.87 118.11,31.39 R23.2 | LED4.A 136.7,15.7 136.7,10.97 LED5.A | 88.7,36.27 89.15,36.27 90.07,35.36 93.57,35.36 v94.18,35.97 | v96.93,35.36 102.41,35.36 103.33,36.27 R25.2 | R26.2 110.8,36.42 110.8,37.34 114.3,40.84 JP3.25 | v81.38,32.46 84.89,32.46 88.7,36.27 | 88.7,36.27 R24.2